# Altium PCB Copy of Backplane_Breakout_Adapter.PcbDoc
Units mil, origin at the board's own origin, x right, y up, seen from the top; angles counter-clockwise.
Board outline 4000 x 4000 mil, 2 copper layers (Top Layer, Bottom Layer); 31 components, 43 nets, 201 pads, 4 vias.
Unrouted connection lines stored in the file: 76.
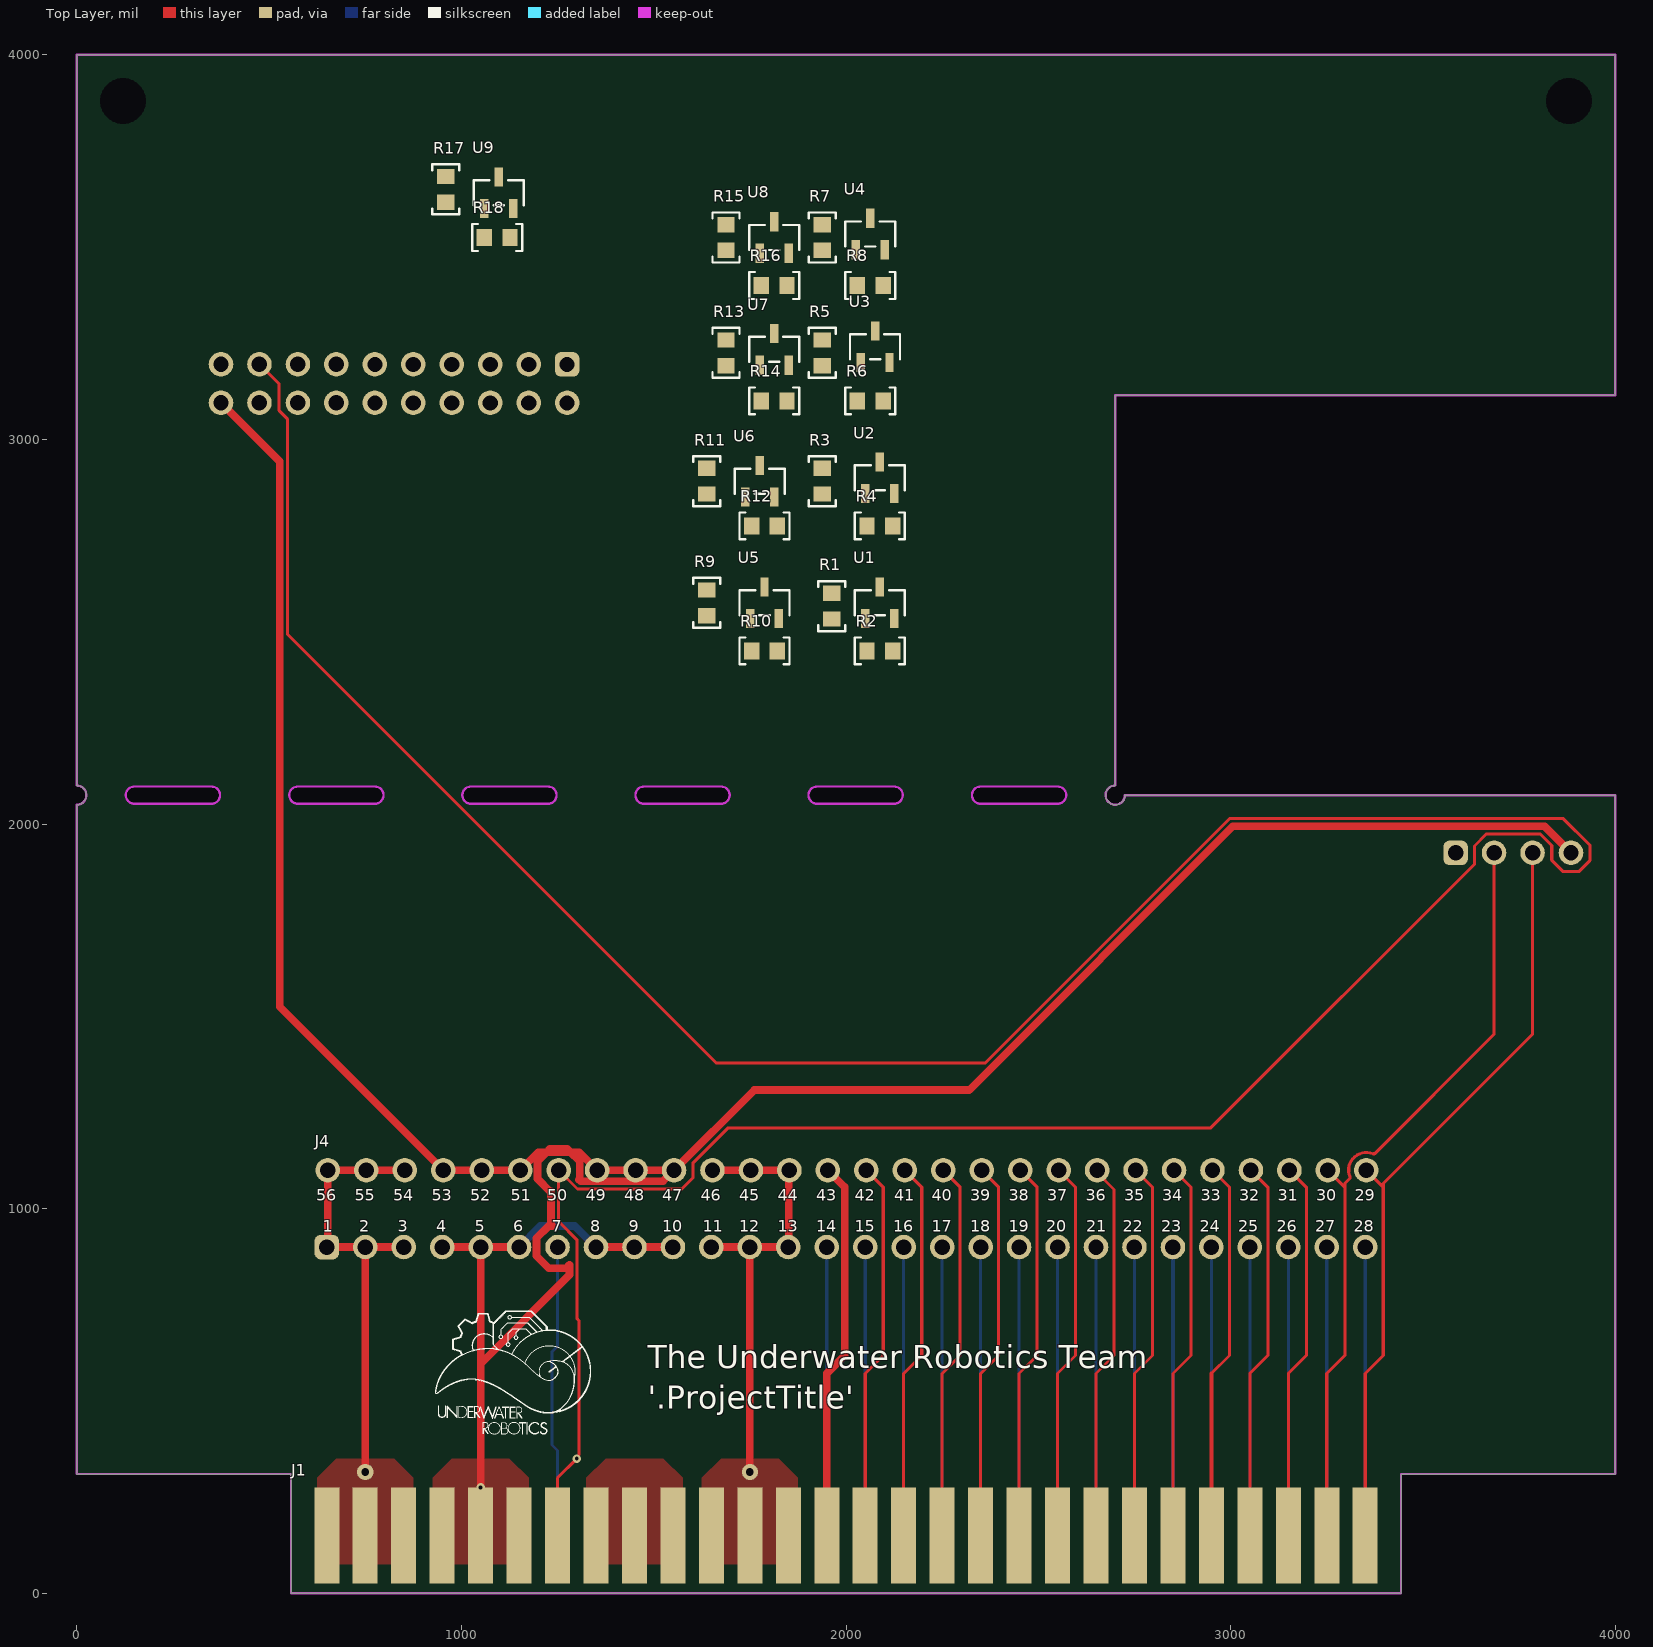
[diagram p0: Top Layer view]
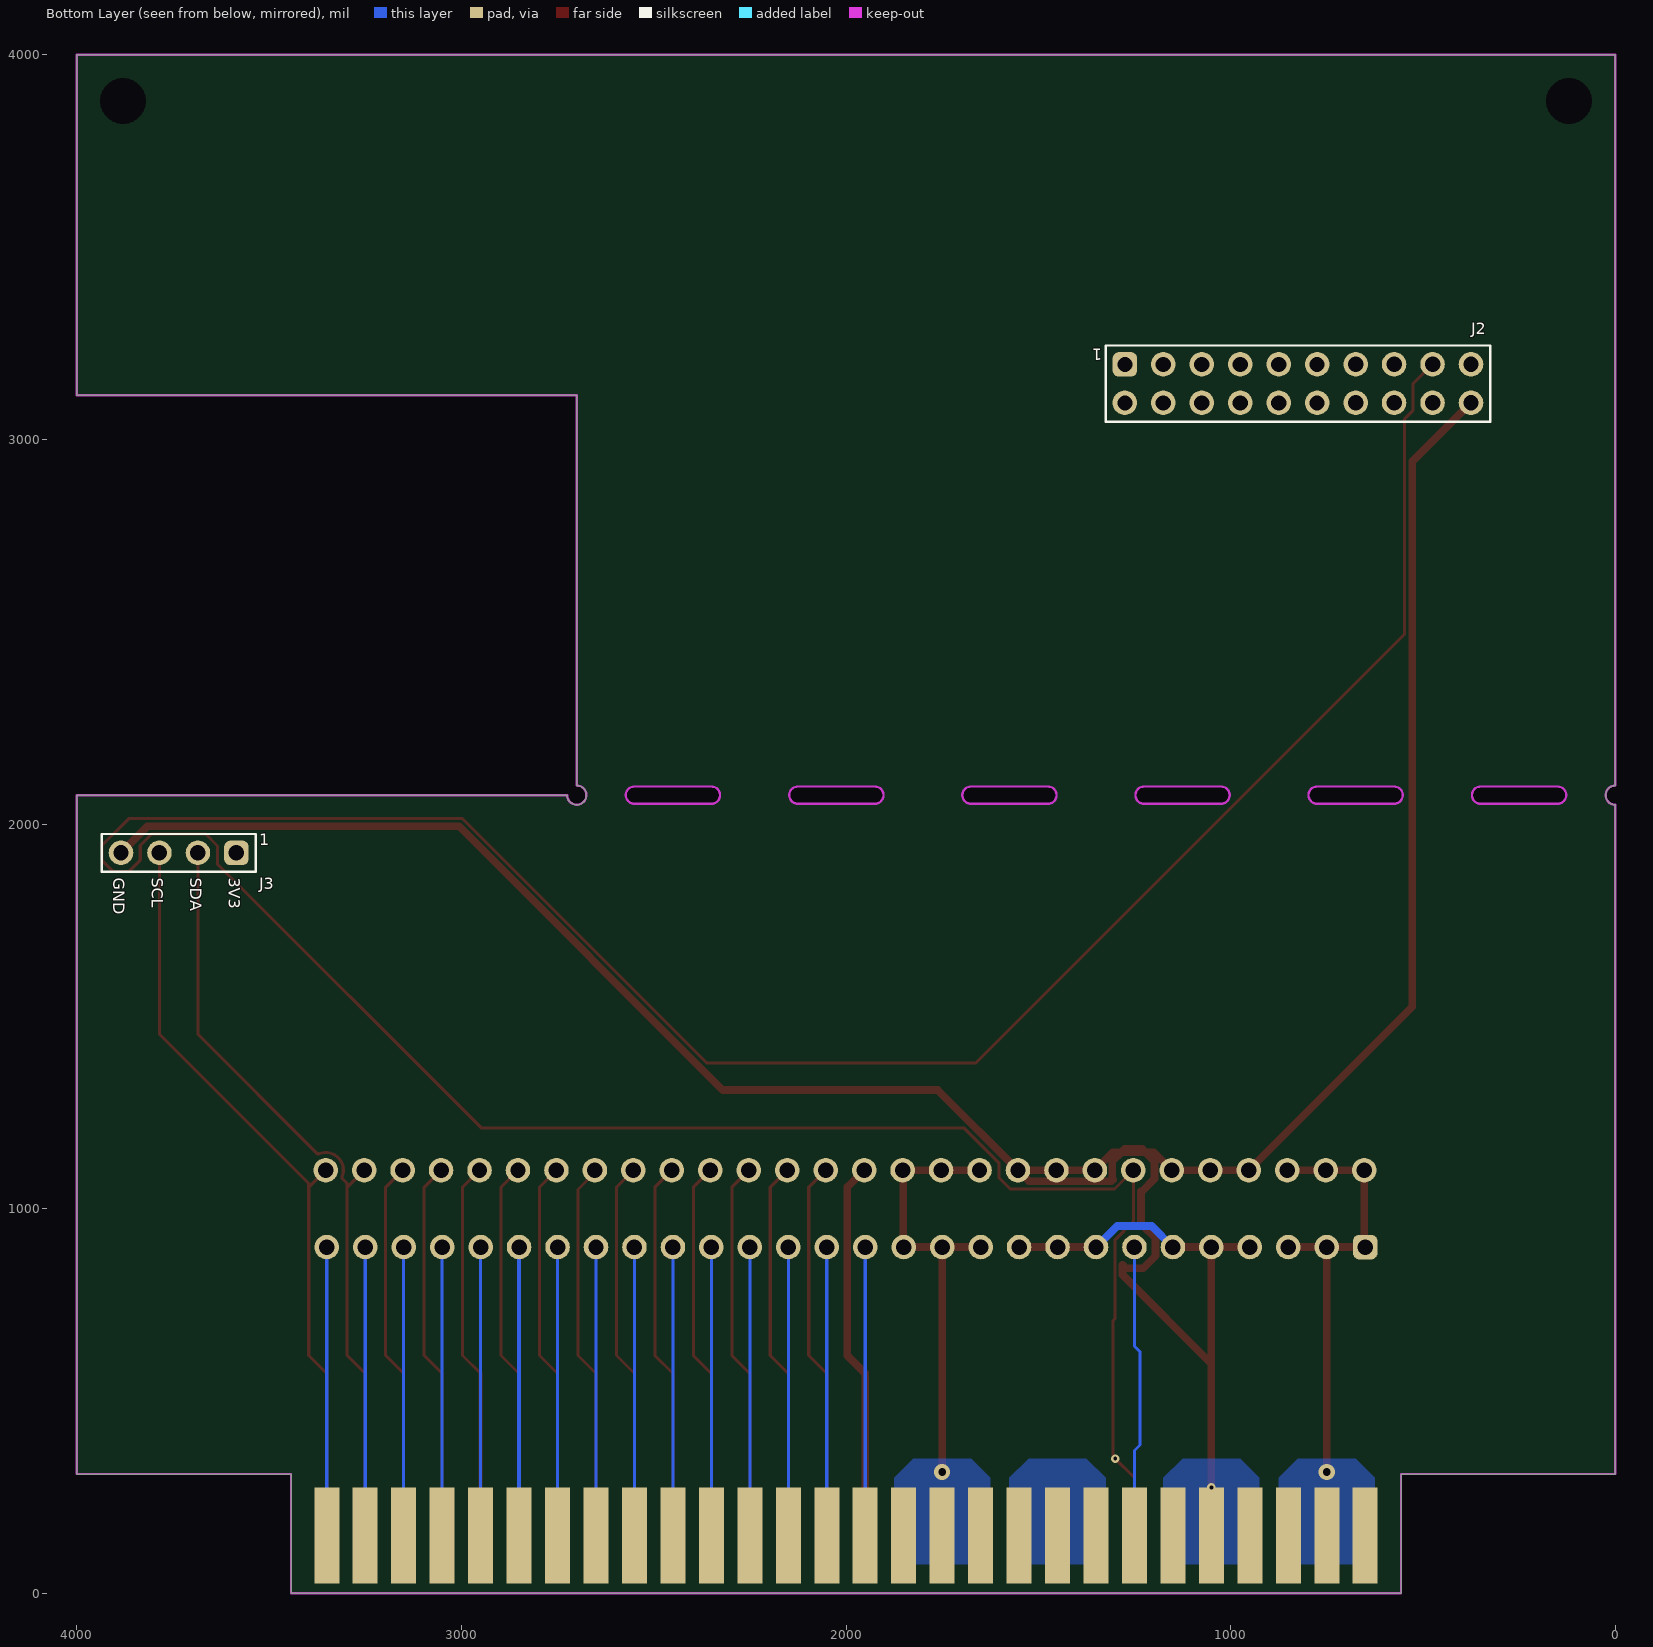
[diagram p1: Bottom Layer view, seen from below]

## Layer stack, top to bottom
Top Solder: solder mask 0.4, Solder Resist, Dk 3.5
Top Layer: signal copper 1.4
Dielectric 1: dielectric 12.6, FR-4, Dk 4.8
Bottom Layer: signal copper 1.4
Bottom Solder: solder mask 0.4, Solder Resist, Dk 3.5

## Board outline
0,310 0,2050 ccw(c0,2075) 0,2100 0,4000 4000,4000 4000,3115 2700,3115 2700,2100 ccw(c2700,2075) 2725,2075 4000,2075 4000,310 3443,310 3443,0 557,0 557,310
cut-out: 2550,2052.5 ccw(c2550,2075) 2550,2097.5 2350,2097.5 ccw(c2350,2075) 2350,2052.5
cut-out: 775,2052.5 ccw(c775,2075) 775,2097.5 575,2097.5 ccw(c575,2075) 575,2052.5
cut-out: 1225,2052.5 1025,2052.5 cw(c1025,2075) 1025,2097.5 1225,2097.5 cw(c1225,2075)
cut-out: 1675,2052.5 ccw(c1675,2075) 1675,2097.5 1475,2097.5 ccw(c1475,2075) 1475,2052.5
cut-out: 2125,2052.5 ccw(c2125,2075) 2125,2097.5 1925,2097.5 ccw(c1925,2075) 1925,2052.5
cut-out: 350,2052.5 150,2052.5 cw(c150,2075) 150,2097.5 350,2097.5 cw(c350,2075)

## Design rules (kind name [scope] priority, off if disabled: settings)
AcuteAngle [All] p1: minimum=9.00000000000000E+0001 checktracksonly=FALSE
BoardOutlineClearance [All] p1: gap=15 ignorepadtopadclearanceinfootprint=FALSE
Clearance "Clearance JLCPCB" [All] p1: gap=6 ignorepadtopadclearanceinfootprint=FALSE except(5: SMDPad-SMDPad; 10: Arc-Via Arc-Hole Track-Via Track-Hole Via-Via Via-Fill Via-Poly Via-Region Fill-Hole Poly-Hole Region-Hole; 13: Arc-THPad Track-THPad THPad-Fill THPad-Poly THPad-Region; 20: THPad-THPad)
ComponentOrientations [All] p1: allowedrotations=32
DiffPairsRouting "USB 2.0" [InDifferentialPairClass('USB 2.0')] p1: maxlimit=6 minlimit=6 mostfreqgap=6 toplayer_minwidth=15 toplayer_maxwidth=15 toplayer_prefwidth=15 bottomlayer_minwidth=15 bottomlayer_maxwidth=15 bottomlayer_prefwidth=15 impedanceprofiledriven=TRUE impedanceprofileid={B279FAB8-9179-4BDF-8125-EF1A8961339F} maxuncoupledlength=500
DiffPairsRouting [All] p2: maxlimit=10 minlimit=10 mostfreqgap=10 toplayer_minwidth=15 toplayer_maxwidth=15 toplayer_prefwidth=15 bottomlayer_minwidth=15 bottomlayer_maxwidth=15 bottomlayer_prefwidth=15 maxuncoupledlength=500
FanoutControl Fanout_Default [All] p5: bgadir=Out bgaviamode=Centered fanoutstyle=Auto fanoutdirection=OutOnly viagrid=1 // Fanout_Default (Default Rule)
HoleSize "HoleSize JLCPCB" [All] p1: absolutevalues=TRUE maxlimit=245 minlimit=8 maxpercent=80.000 minpercent=20.000
HoleToHoleClearance "HoleToHoleClearance JLCPCB" [All] p1: gap=20 allowstackedmicrovias=TRUE
MinimumAnnularRing "MinimumAnnularRing JLCPCB" [All] p1: minimumring=6
MinimumSolderMaskSliver "MinimumSolderMaskSliver JLCPCB" [All] p1: minsoldermaskwidth=10
PasteMaskExpansion [All] p1: expansion=1
PolygonConnect EdgeConnect [(IsNamedPolygon('PolygonDirect'))] p1: connectstyle=Direct reliefconductorwidth=10 reliefentries=4 polygonreliefangle="90 Angle" airgapwidth=10
PolygonConnect [All] p2: connectstyle=Relief reliefconductorwidth=10 reliefentries=4 polygonreliefangle="90 Angle" airgapwidth=10
RoomDefinition RP2040_Evaluation_Design [InComponentClass('RP2040_Evaluation_Design')] p1: confinementstyle=ConfineIn formatcopy=TRUE lockcomponents=FALSE outline 2750,600 3150,600 3150,1050 2750,1050
RoutingVias "RoutingVias JLCPCB" [All] p1: holewidth=10 width=22 viastyle="Through Hole" minholewidth=8 minwidth=20 maxholewidth=28 maxwidth=40
SMDEntry [All] p1: side=TRUE corner=TRUE anyangle=FALSE
SMDToCorner [All] p1: distance=0
SMDToPlane [All] p1: distance=0
SilkToSilkClearance "SilkToSilkClearance JLCPCB" [All] p1: silktosilkclearance=10
SilkToSolderMaskClearance "SilkToSolderMaskClearance JLCPCB" [IsPad] p1: minsilkscreentomaskgap=6 clearancetoexposedcopper=TRUE
SolderMaskExpansion [All] p1: expansion=4 istentingtop=FALSE
UnRoutedNet [All] p1: checkbadconnections=TRUE
Width "Width JLCPCB" [All] p1: maxlimit=100 minlimit=6 preferedwidth=10
21 further rules are at their usual default settings.

## Components (designator, comment, footprint, x,y, rotation, side; value= is the part's Value field where it differs from the comment)
J1 "Backplane Connector" BACKPLANE_EDGE_CONN 650,150 r0 top locked
J2 "RP2040 GPIO Header" HEADER_MIRRORED_2x10PIN_2.54MM 1275,3195 r0 bottom locked
J3 "CONN HEADER VERT 4POS 2.54MM" HEADER_MIRRORED_4PIN_2.54MM 3585,1925 r180 bottom locked
J4 "Backplane Connector" HEADER_2X28PIN_2.54MM 650,900 r0 top locked
R1 "10k Ohm 5% 1/10W" RESISTOR_0603 1963.08,2566.5 r90 top
R2 "10k Ohm 5% 1/10W" RESISTOR_0603 2088.08,2450 r180 top
R3 "10k Ohm 5% 1/10W" RESISTOR_0603 1938.08,2891.5 r90 top
R4 "10k Ohm 5% 1/10W" RESISTOR_0603 2088.08,2775 r180 top
R5 "10k Ohm 5% 1/10W" RESISTOR_0603 1938.08,3225 r90 top
R6 "10k Ohm 5% 1/10W" RESISTOR_0603 2063.08,3100 r180 top
R7 "10k Ohm 5% 1/10W" RESISTOR_0603 1938.08,3525 r90 top
R8 "10k Ohm 5% 1/10W" RESISTOR_0603 2063.08,3400 r180 top
R9 "10k Ohm 5% 1/10W" RESISTOR_0603 1638.08,2575 r90 top
R10 "10k Ohm 5% 1/10W" RESISTOR_0603 1788.08,2450 r180 top
R11 "10k Ohm 5% 1/10W" RESISTOR_0603 1638.08,2891.5 r90 top
R12 "10k Ohm 5% 1/10W" RESISTOR_0603 1788.08,2775 r180 top
R13 "10k Ohm 5% 1/10W" RESISTOR_0603 1688.08,3225 r90 top
R14 "10k Ohm 5% 1/10W" RESISTOR_0603 1813.08,3100 r180 top
R15 "10k Ohm 5% 1/10W" RESISTOR_0603 1688.08,3525 r90 top
R16 "10k Ohm 5% 1/10W" RESISTOR_0603 1813.08,3400 r180 top
R17 "10k Ohm 5% 1/10W" RESISTOR_0603 959.54,3650 r90 top
R18 "10k Ohm 5% 1/10W" RESISTOR_0603 1093.04,3525 r180 top
U1 "AO3404A" SOT-23-3 2088.08,2575 r0 top
U2 "AO3404A" SOT-23-3 2088.08,2900 r0 top
U3 "AO3404A" SOT-23-3 2075.58,3241 r0 top
U4 "AO3404A" SOT-23-3 2063.08,3534 r0 top
U5 "AO3404A" SOT-23-3 1788.08,2575 r0 top
U6 "AO3404A" SOT-23-3 1775.58,2891 r0 top
U7 "AO3404A" SOT-23-3 1813.08,3234 r0 top
U8 "AO3404A" SOT-23-3 1813.08,3525 r0 top
U9 "AO3404A" SOT-23-3 1097.04,3641 r0 top

## Footprints (in the part's own frame and the unit in brackets; to place one, negate y for a bottom-side part, rotate by r counter-clockwise, add the part's x,y. Pads: shape width x height; smd on the part's side, far side on the other; paste and mask are expansions set on the pad)
BACKPLANE_EDGE_CONN [mil]
  rect 65x250 smd far side: 1(0,0) 2(100,0) 3(200,0) 4(300,0) 5(400,0) 6(500,0) 7(600,0) 8(700,0) 9(800,0) 10(900,0) 11(1000,0) 12(1100,0) 13(1200,0) 14(1300,0) 15(1400,0) 16(1500,0) 17(1600,0) 18(1700,0) 19(1800,0) 20(1900,0) 21(2000,0) 22(2100,0) 23(2200,0) 24(2300,0) 25(2400,0) 26(2500,0) 27(2600,0) 28(2700,0)
  rect 65x250 smd: 29(2700,0) 30(2600,0) 31(2500,0) 32(2400,0) 33(2300,0) 34(2200,0) 35(2100,0) 36(2000,0) 37(1900,0) 38(1800,0) 39(1700,0) 40(1600,0) 41(1500,0) 42(1400,0) 43(1300,0) 44(1200,0) 45(1100,0) 46(1000,0) 47(900,0) 48(800,0) 49(700,0) 50(600,0) 51(500,0) 52(400,0) 53(300,0) 54(200,0) 55(100,0) 56(0,0)
HEADER_2X28PIN_2.54MM [mm]
  rrect50% 1.62x1.62 hole 1.02: 1(0,0)
  round 1.62 hole 1.02: 2(2.54,0) 3(5.08,0) 4(7.62,0) 5(10.16,0) 6(12.7,0) 7(15.24,0) 8(17.78,0) 9(20.32,0) 10(22.86,0) 11(25.4,0) 12(27.94,0) 13(30.48,0) 14(33.02,0) 15(35.56,0) 16(38.1,0) 17(40.64,0) 18(43.18,0) 19(45.72,0) 20(48.26,0) 21(50.8,0) 22(53.34,0) 23(55.88,0) 24(58.42,0) 25(60.96,0) 26(63.5,0) 27(66.04,0) 28(68.58,0) 29(68.653,5.08) 30(66.113,5.08) 31(63.573,5.08) 32(61.033,5.08) 33(58.493,5.08) 34(55.953,5.08) 35(53.413,5.08) 36(50.873,5.08) 37(48.333,5.08) 38(45.793,5.08) 39(43.253,5.08) 40(40.713,5.08) 41(38.173,5.08) 42(35.633,5.08) 43(33.093,5.08) 44(30.553,5.08) 45(28.013,5.08) 46(25.473,5.08) 47(22.933,5.08) 48(20.393,5.08) 49(17.853,5.08) 50(15.313,5.08) 51(12.773,5.08) 52(10.233,5.08) 53(7.693,5.08) 54(5.153,5.08) 55(2.613,5.08) 56(0.073,5.08)
HEADER_MIRRORED_2x10PIN_2.54MM [mm]
  rrect50% 1.62x1.62 hole 1: 1(0,0)
  round 1.62 hole 1: 2(0,2.54) 3(-2.54,0) 4(-2.54,2.54) 5(-5.08,0) 6(-5.08,2.54) 7(-7.62,0) 8(-7.62,2.54) 9(-10.16,0) 10(-10.16,2.54) 11(-12.7,0) 12(-12.7,2.54)
  round 1.62 hole 1.02: 13(-15.24,0) 14(-15.24,2.54) 15(-17.78,0) 16(-17.78,2.54) 17(-20.32,0) 18(-20.32,2.54) 19(-22.86,0) 20(-22.86,2.54)
  silkscreen extent -24.13,-1.25 1.27,3.79, body extent -24.13,-1.25 1.27,3.75, height 7.01
HEADER_MIRRORED_4PIN_2.54MM [mm]
  rrect50% 1.62x1.62 hole 1.02: 1(0,0)
  round 1.62 hole 1.02: 2(-2.54,0) 3(-5.08,0) 4(-7.62,0)
  silkscreen extent -8.89,-1.25 1.27,1.25, body extent -8.89,-1.27 1.27,1.27, height 10.48
RESISTOR_0603 [mil] "Resistor 0603"
  rect 40x45 smd: 1(-33.5,0) 2(33.5,0)
  silkscreen extent -65,-35 65,35, body extent -31,-16 31,16, height 16
SOT-23-3 [mil]
  rect 22x50 smd paste+0 mask+4: 1(-37.5,-41) 2(37.5,-41) 3(0,41)
  silkscreen extent -65,-32 65,32, body extent -60,-52 60,52, height 44

## Part data
J1 J4: library part BACKBOARD_EDGE_CONN, "Titan Backplane Edge Connector"
J2: library part HEADER_2x10PIN_2.54MM_RP2040_GPIO, "CONN HEADER VERT 20POS 2.54MM", Supplier Part Number 1=Z8747-ND, Made By="Robert Pafford", Supplier 1=Digi-Key
J3: library part HEADER_4PIN_2.54MM, Supplier Part Number 1=S1012E-04-ND, Made By="Robert Pafford", Supplier 1=Digi-Key
R1 R2 R3 R4 R5 R6 R7 R8 R9 R10 R11 R12 R13 R14 R15 R16 R17 R18: library part RESISTOR_10K_0603, "RES 10k OHM 5% 1/10W 0603", Digikey Part Numer=CR0603-JW-104ELFTR-ND, Supplier Part Number 1=2019-RK73B1JTTD103JCT-ND, Tolerance="+/- 5%", Value  (Ohms)=10K, ComponentLink1Description=Datasheet, ComponentLink1URL=https://www.bourns.com/docs/product-datasheets/CRxxxxx.pdf, Made By="Robert Pafford", Supplier=Digikey, Supplier 1=Digi-Key, Wattage=1/8W
U1 U2 U3 U4 U5 U6 U7 U8 U9: "N-Channel 30 V 5.8A (Ta) 1.4W (Ta) Surface Mount SOT-23-3", Amp Rating="5.8 A", Package=SOT23-3L, Power Dissipation="1.4W (Ta)", Supplier Part Number 1=785-1004-1-ND, Created By="Dylan T", FET Type=N-Channel, Manufacturer _Part_Number=AO3404A, Rds (on)="28mOhm @ 5.8A, 10V", SourceLibrary=ON_Semiconductor_2020-01-13, Supplier 1=Digi-Key, Vdss=30V, Vendor="Alpha & Omega Semiconductor Inc.", Vgs (Max)="3V @ 5.8A, 10V", Vgs (th)="3V @ 250µA"

## Free pads (board coordinates)
  round 60 hole 120: 1(120,3880) 1(3880,3880)

## Via types
v1: diameter 22, hole 10, Top Layer to Bottom Layer, 2 vias
v2: diameter 42, hole 20, Top Layer to Bottom Layer, 2 vias

## Nets (pads, with @x,y where several pads share a name; then routed paths per layer and width w, separated by ;. In a path a pad name is that pad's centre, name@x,y a point inside that pad or via, vN(x,y) a via of type N, cw(c..) or ccw(c..) an arc to the next point about the centre after c; other vN are vias at no path point)
3V3: J1.1 J1.2 J1.3 J1.43 J1.54 J1.55 J1.56 J2.1 J2.2 J3.1 J4.1 J4.2 J4.3 J4.43 J4.54 J4.55 J4.56 R2.2 R4.2 R6.2 R8.2 R10.2 R12.2 R14.2 R16.2 R18.2 U1.1 U2.1 U3.1 U4.1 U5.1 U6.1 U7.1 U8.1 U9.1 | length 2173.8
  Top Layer w20: v2(750,315) J4.2 ; J4.3 J4.2 ; J4.54 J4.55 J4.56 652.85,902.85 J4.1 J4.2 ; J1.43 1950,571.27 1996.89,618.16 1996.89,1055.96 J4.43
3V3_ON/OFF: J1.14 J4.14 | length 750
  Bottom Layer w8: J1.14 J4.14
5V: J1.11 J1.12 J1.13 J1.44 J1.45 J1.46 J4.11 J4.12 J4.13 J4.44 J4.45 J4.46 R1.1 R3.1 R5.1 R7.1 R9.1 R11.1 R13.1 R15.1 R17.1 | length 1186.2
  Top Layer w20: J4.11 J4.12 ; J4.46 J4.45 J4.44 1851.43,1098.57 1851.43,901.43 J4.13 J4.12 ; v2(1750,315) J4.12
5V_ON/OFF: J1.15 J2.4 J4.15 | length 750
  Bottom Layer w8: J1.15 J4.15
12V_ON/OFF: J1.16 J4.16 | length 750
  Bottom Layer w8: J1.16 J4.16
ACOUSTIC_ON/OFF: J1.17 J4.17 | length 750
  Bottom Layer w8: J1.17 J4.17
BOARD_SCL: J1.31 J2.16 J4.31 | length 987.7
  Top Layer w8: J1.31 3150,571.27 3196.89,618.16 3196.89,1055.96 J4.31
BOARD_SDA: J1.32 J2.15 J4.32 | length 987.7
  Top Layer w8: J1.32 3050,571.27 3096.89,618.16 3096.89,1055.96 J4.32
GND: J1.4 J1.5 J1.6 J1.8 J1.9 J1.10 J1.47 J1.48 J1.49 J1.51 J1.52 J1.53 J2.19 J2.20 J3.4 J4.4 J4.5 J4.6 J4.8 J4.9 J4.10 J4.47 J4.48 J4.49 J4.51 J4.52 J4.53 | length 8195.2
  Top Layer w10: J4.8 J4.8@1350,910.53
  Top Layer w20: J2.20 527.5,2942.5 527.5,1525.35 J4.53 J4.52 J4.51 1199.74,1146.89 1222.12,1146.89 ; J4.4 J4.5 ; J1.52 v1(1050,275) 1050,597.15 ; J4.6 J4.5 ; J4.8 J4.9 J4.10 ; J3.4 3816.11,1993.89 3005.61,1993.89 2320,1308.28 1761.14,1308.28 J4.47 ; 1050,597.15 1281.11,828.26 1281.11,853.48 1272.74,845.11 1227.26,845.11 1195.11,877.26 1195.11,922.74 1227.26,954.89 1235.97,954.89 1232.85,958 1232.85,1045.11 1230.12,1045.11 1197.96,1077.26 1197.96,1122.74 1222.12,1146.89 ; 1050,597.15 J4.5 ; 1222.12,1146.89 1230.12,1154.89 1275.59,1154.89 1283.59,1146.89 ; 1222.12,1146.89 1283.59,1146.89 ; 1283.59,1146.89 1307.74,1122.74 1307.74,1077.26 1305.81,1075.33 1310.03,1071.11 1523.96,1071.11 J4.47 ; 1283.59,1146.89 1305.96,1146.89 J4.49 J4.48 J4.47
  Bottom Layer w20: J4.6 1204.89,954.89 1295.11,954.89 J4.8
JETSON_ON/OFF: J1.18 J4.18 | length 750
  Bottom Layer w8: J1.18 J4.18
KILL_SWITCH: J1.37 J2.14 J4.37 | length 987.7
  Top Layer w8: J1.37 2550,571.27 2596.89,618.16 2596.89,1055.96 J4.37
MOBO_ON/OFF: J1.19 J2.6 J4.19 | length 750
  Bottom Layer w8: J1.19 J4.19
PWM_1: J1.20 J4.20 R1.2 U1.3 | length 750
  Bottom Layer w8: J1.20 J4.20
PWM_2: J1.21 J4.21 R3.2 U2.3 | length 750
  Bottom Layer w8: J1.21 J4.21
PWM_3: J1.22 J4.22 R5.2 U3.3 | length 750
  Bottom Layer w8: J1.22 J4.22
PWM_3V3_1: J2.18 R2.1 U1.2
PWM_3V3_2: J2.13 R4.1 U2.2
PWM_3V3_3: J2.11 R6.1 U3.2
PWM_3V3_4: J2.9 R8.1 U4.2
PWM_3V3_5: J2.7 R10.1 U5.2
PWM_3V3_6: J2.5 R12.1 U6.2
PWM_3V3_7: J2.3 R14.1 U7.2
PWM_3V3_8: J2.8 R16.1 U8.2
PWM_3V3_9: J2.10 R18.1 U9.2
PWM_4: J1.23 J4.23 R7.2 U4.3 | length 750
  Bottom Layer w10: J1.23 J4.23
PWM_5: J1.24 J4.24 R9.2 U5.3 | length 750
  Bottom Layer w8: J1.24 J4.24
PWM_6: J1.25 J4.25 R11.2 U6.3 | length 750
  Bottom Layer w8: J1.25 J4.25
PWM_7: J1.26 J4.26 R13.2 U7.3 | length 750
  Bottom Layer w8: J1.26 J4.26
PWM_8: J1.27 J4.27 R15.2 U8.3 | length 750
  Bottom Layer w8: J1.27 J4.27
PWM_9: J1.33 J4.33 R17.2 U9.3 | length 987.7
  Top Layer w8: 2950,571.27 2996.89,618.16 2996.89,1055.96 J4.33
  Top Layer w10: J1.33 2950,571.27
PWM_10: J1.34 J4.34 | length 987.7
  Top Layer w8: J1.34 2850,571.27 2896.89,618.16 2896.89,1055.96 J4.34
SENSOR_SCL: J1.29 J3.3 J4.29 | length 2017.5
  Top Layer w8: J1.29 3350,571.27 3396.89,618.16 3396.89,1055.96 ; J4.29 3396.89,1055.96 ; J3.3 3785,1453.23 3396.89,1065.12 3396.89,1055.96
SENSOR_SDA: J1.30 J3.2 J4.30 | length 2042.6
  Top Layer w8: J1.30 3250,571.27 3296.89,618.16 3296.89,1055.96 ; J4.30 3296.89,1055.96 ; J3.2 3685,1453.23 3374.46,1142.69 3371.14,1142.69 3369.69,1142.69 ccw(c3352.85,1100) 3310.16,1083.17 3310.16,1081.71 3310.16,1078.4 3296.89,1065.12 3296.89,1055.96
SPARE1: J1.7 J4.7 | length 762
  Bottom Layer w8: J1.7 1250,371.01 1235.5,385.5 1235.5,627.96 1250,642.45 J4.7
SPARE2: J1.28 J4.28 | length 750
  Bottom Layer w8: J1.28 J4.28
SPARE5: J1.35 J4.35 | length 987.7
  Top Layer w8: J1.35 2750,571.27 2796.89,618.16 2796.89,1055.96 J4.35
SPARE6: J1.36 J4.36 | length 987.7
  Top Layer w8: J1.36 2650,571.27 2696.89,618.16 2696.89,1049.83 J4.36@2652.85,1093.86
  Top Layer w10: J4.36@2652.85,1093.86 J4.36
SPARE8: J1.50 J2.17 J4.50 | length 9115.5
  Top Layer w8: J2.17 526.11,3143.89 526.11,3074.75 547.5,3053.36 547.5,2493.81 1663.24,1378.07 2361.5,1378.07 2997.32,2013.89 3865.25,2013.89 3933.89,1945.25 3933.89,1904.75 3905.25,1876.11 3864.75,1876.11 3835,1905.86 3835,1944.14 3805.25,1973.89 3664.75,1973.89 3633.89,1943.03 3633.89,1895.41 2948.61,1210.13 1693.84,1210.13 1601.74,1118.03 1601.74,1079.75 1573.11,1051.11 1301.74,1051.11 J4.50 1252.85,966.29 1301.11,918.03 1301.11,713.27 1305.5,708.88 1305.5,359.29 1300,353.79 v1(1300,350) 1250,300 J1.50
SWITCH_1: J1.38 J2.12 J4.38 | length 987.7
  Top Layer w8: J1.38 2450,571.27 2496.89,618.16 2496.89,1055.96 J4.38
SWITCH_2: J1.39 J4.39 | length 987.7
  Top Layer w8: J1.39 2350,571.27 2396.89,618.16 2396.89,1055.96 J4.39
SWITCH_3: J1.40 J4.40 | length 987.7
  Top Layer w8: J1.40 2250,571.27 2296.89,618.16 2296.89,1055.96 J4.40
SWITCH_4: J1.41 J4.41 | length 987.7
  Top Layer w8: J1.41 2150,571.27 2196.89,618.16 2196.89,1055.96 J4.41
SWITCH_5: J1.42 J4.42 | length 987.7
  Top Layer w8: J1.42 2050,571.27 2096.89,618.16 2096.89,1055.96 J4.42

## Polygon pours and split planes (outlines as drawn)
5V on Bottom Layer "PolygonDirect" (solid, pour order 6): 1625,75 1625,300 1675,350 1825,350 1875,300 1875,75
GND on Bottom Layer "PolygonDirect" (solid, pour order 4): 1325,75 1325,300 1375,350 1525,350 1575,300 1575,75
GND on Bottom Layer "PolygonDirect" (solid, pour order 3): 925,75 925,300 975,350 1125,350 1175,300 1175,75
3V3 on Bottom Layer "PolygonDirect" (solid, pour order 0): 625,75 625,300 675,350 825,350 875,300 875,75
5V on Top Layer "PolygonDirect" (solid, pour order 7): 1625,75 1625,300 1675,350 1825,350 1875,300 1875,75
GND on Top Layer "PolygonDirect" (solid, pour order 5): 1325,75 1325,300 1375,350 1525,350 1575,300 1575,75
GND on Top Layer "PolygonDirect" (solid, pour order 2): 925,75 925,300 975,350 1125,350 1175,300 1175,75
3V3 on Top Layer "PolygonDirect" (solid, pour order 1): 625,75 625,300 675,350 825,350 875,300 875,75

## Keep-outs
Keep-Out Layer:
  lines w6: 0,310 0,2050 ccw(c0,2075) 0,2100 0,4000 4000,4000 4000,3115 2700,3115 2700,2100 ccw(c2700,2075) 2725,2075 4000,2075 4000,310 3443,310 3443,0 557,0 557,310 0,310 ; 150,2052.5 cw(c150,2075) 150,2097.5 350,2097.5 cw(c350,2075) 350,2052.5 150,2052.5 ; 575,2052.5 cw(c575,2075) 575,2097.5 775,2097.5 cw(c775,2075) 775,2052.5 575,2052.5 ; 1025,2052.5 cw(c1025,2075) 1025,2097.5 1225,2097.5 cw(c1225,2075) 1225,2052.5 1025,2052.5 ; 1475,2052.5 cw(c1475,2075) 1475,2097.5 1675,2097.5 cw(c1675,2075) 1675,2052.5 1475,2052.5 ; 1925,2052.5 cw(c1925,2075) 1925,2097.5 2125,2097.5 cw(c2125,2075) 2125,2052.5 1925,2052.5 ; 2350,2052.5 cw(c2350,2075) 2350,2097.5 2550,2097.5 cw(c2550,2075) 2550,2052.5 2350,2052.5

## Silkscreen, mask and mechanical layers (free items; w line width, h text height)
Top Overlay:
  drawing of 19 lines, arcs and shapes, not listed
  text "The Underwater Robotics Team" at 1485,585 h60
  text "'.ProjectTitle'" at 1485,479.99 h60
Bottom Overlay:
  text "3V3" at 3604.99,1860 h30 r90
  text "SDA" at 3704.99,1860 h30 r90
  text "SCL" at 3804.99,1860 h30 r90
  text "GND" at 3904.99,1860 h30 r90

## Text inside footprints (layer, text, board x,y; h text height)
J2: Bottom Overlay "1" at 1334,3236 h30 r180
J3: Bottom Overlay "1" at 3525,1945 h30
J4: Top Overlay "9" at 1435,940 h30; Top Overlay "8" at 1335,940 h30; Top Overlay "20" at 2520.01,940 h30; Top Overlay "27" at 3220.01,940 h30; Top Overlay "7" at 1235,940 h30; Top Overlay "21" at 2625.01,940 h30; Top Overlay "46" at 1622.86,1020.01 h30; Top Overlay "28" at 3320.01,940 h30; Top Overlay "25" at 3020.01,940 h30; Top Overlay "14" at 1922.51,940 h30; Top Overlay "18" at 2322.51,940 h30; Top Overlay "13" at 1822.51,940 h30; Top Overlay "29" at 3322.86,1020.01 h30; Top Overlay "49" at 1322.86,1020.01 h30; Top Overlay "34" at 2822.86,1020.01 h30; Top Overlay "30" at 3222.86,1020.01 h30; Top Overlay "22" at 2720.01,940 h30; Top Overlay "52" at 1022.86,1020.01 h30; Top Overlay "26" at 3120.01,940 h30; Top Overlay "51" at 1127.86,1020.01 h30; Top Overlay "48" at 1422.86,1020.01 h30; Top Overlay "47" at 1522.86,1020.01 h30; Top Overlay "50" at 1222.86,1020.01 h30; Top Overlay "12" at 1722.51,940 h30; Top Overlay "38" at 2422.86,1020.01 h30; Top Overlay "32" at 3022.86,1020.01 h30; Top Overlay "44" at 1822.86,1020.01 h30; Top Overlay "15" at 2022.51,940 h30; Top Overlay "42" at 2022.86,1020.01 h30; Top Overlay "33" at 2922.86,1020.01 h30; Top Overlay "43" at 1922.86,1020.01 h30; Top Overlay "35" at 2722.86,1020.01 h30; Top Overlay "11" at 1627.51,940 h30; Top Overlay "56" at 622.86,1020.01 h30; Top Overlay "23" at 2820.01,940 h30; Top Overlay "16" at 2122.51,940 h30; Top Overlay "2" at 735,940 h30; Top Overlay "37" at 2522.86,1020.01 h30; Top Overlay "1" at 640,940 h30; Top Overlay "31" at 3122.86,1020.01 h30; Top Overlay "54" at 822.86,1020.01 h30; Top Overlay "41" at 2125.36,1020.01 h30; Top Overlay "10" at 1522.51,940 h30; Top Overlay "4" at 935,940 h30; Top Overlay "39" at 2322.86,1020.01 h30; Top Overlay "45" at 1722.86,1020.01 h30; Top Overlay "6" at 1135,940 h30; Top Overlay "5" at 1035,940 h30; Top Overlay "55" at 722.86,1020.01 h30; Top Overlay "36" at 2622.86,1020.01 h30; Top Overlay "3" at 835,940 h30; Top Overlay "17" at 2222.51,940 h30; Top Overlay "40" at 2222.86,1020.01 h30; Top Overlay "24" at 2920.01,940 h30; Top Overlay "53" at 922.86,1020.01 h30; Top Overlay "19" at 2422.51,940 h30